# EAGLE board MicroMod-RP2040-ProcessorBoard-Panel (EAGLE 9.6.2), part 1 of 7
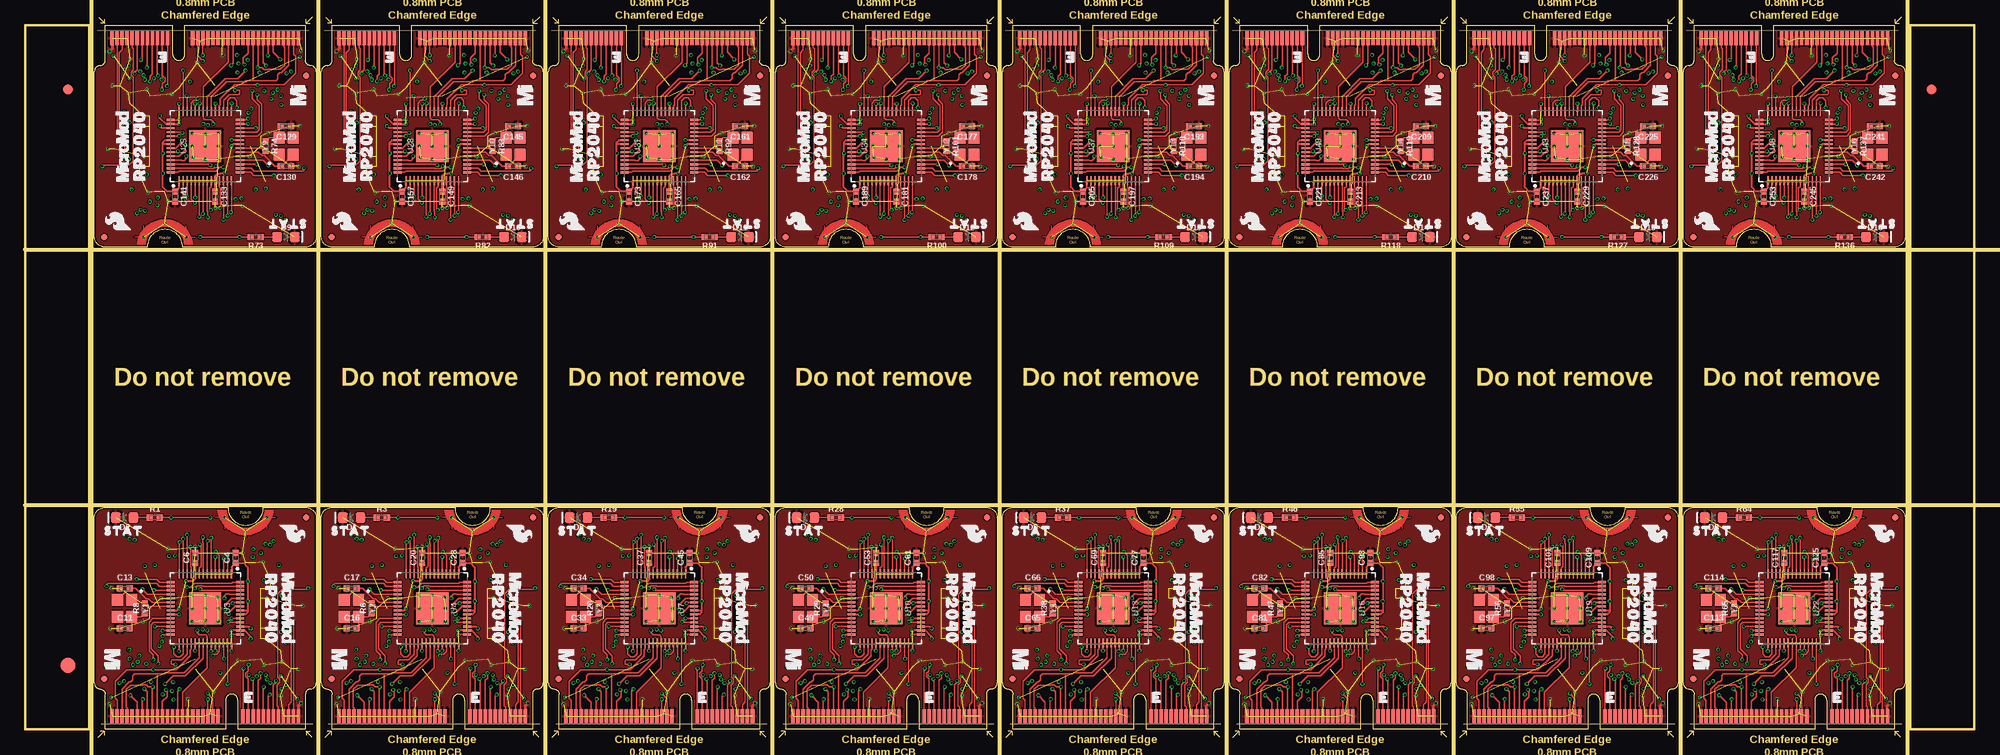
[diagram p0: board, top side]
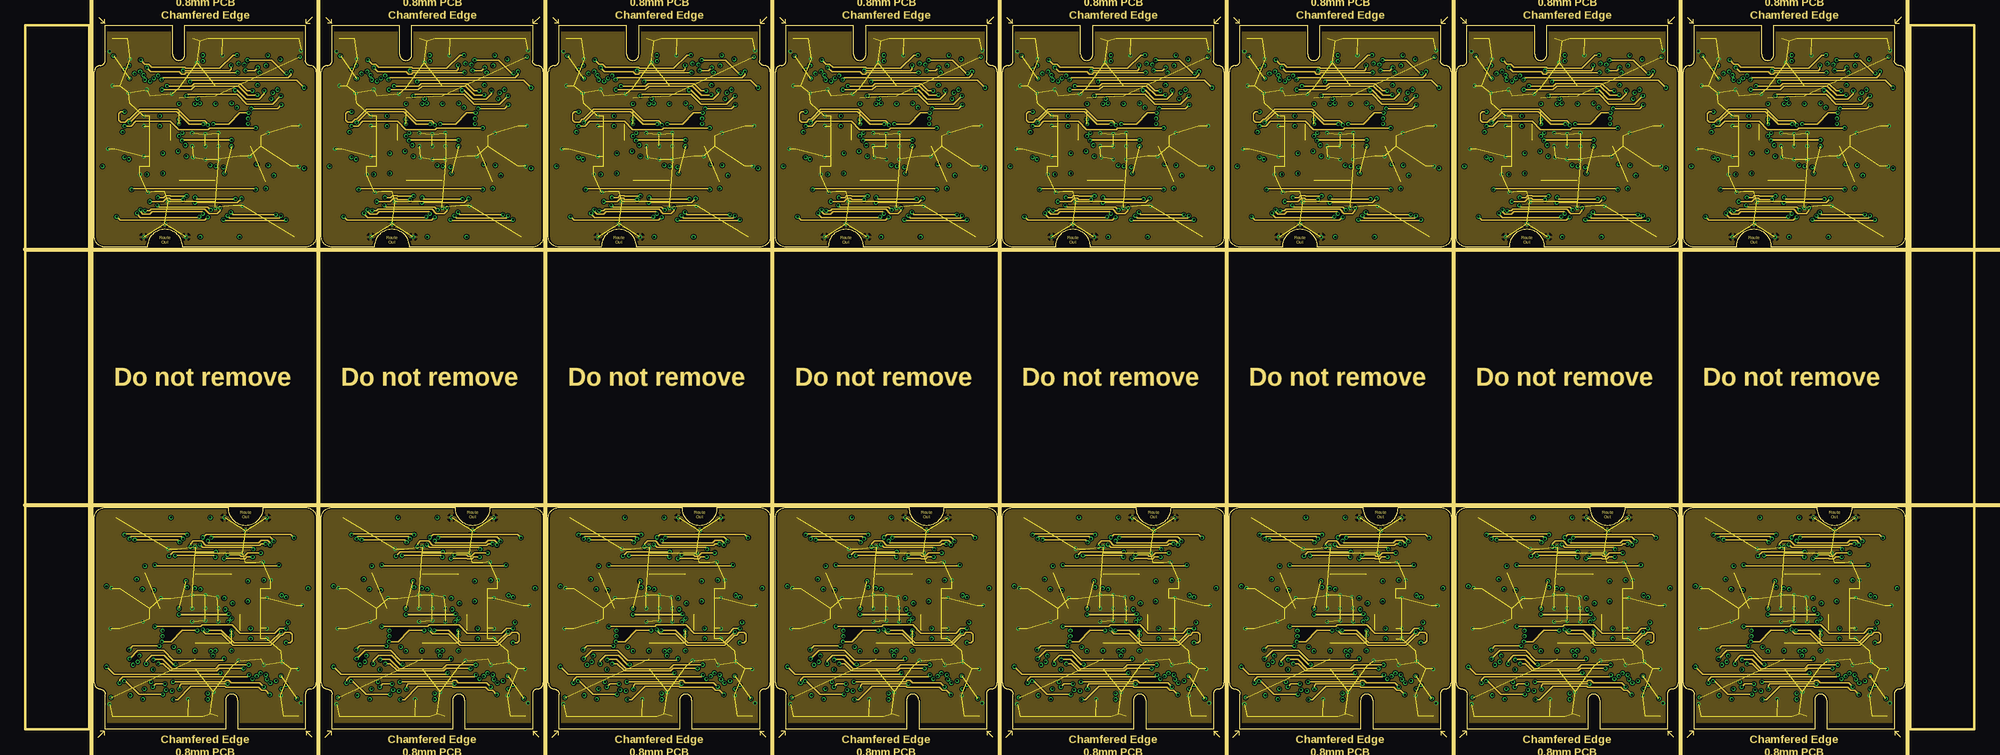
[diagram p1: board, inner layer Route2]
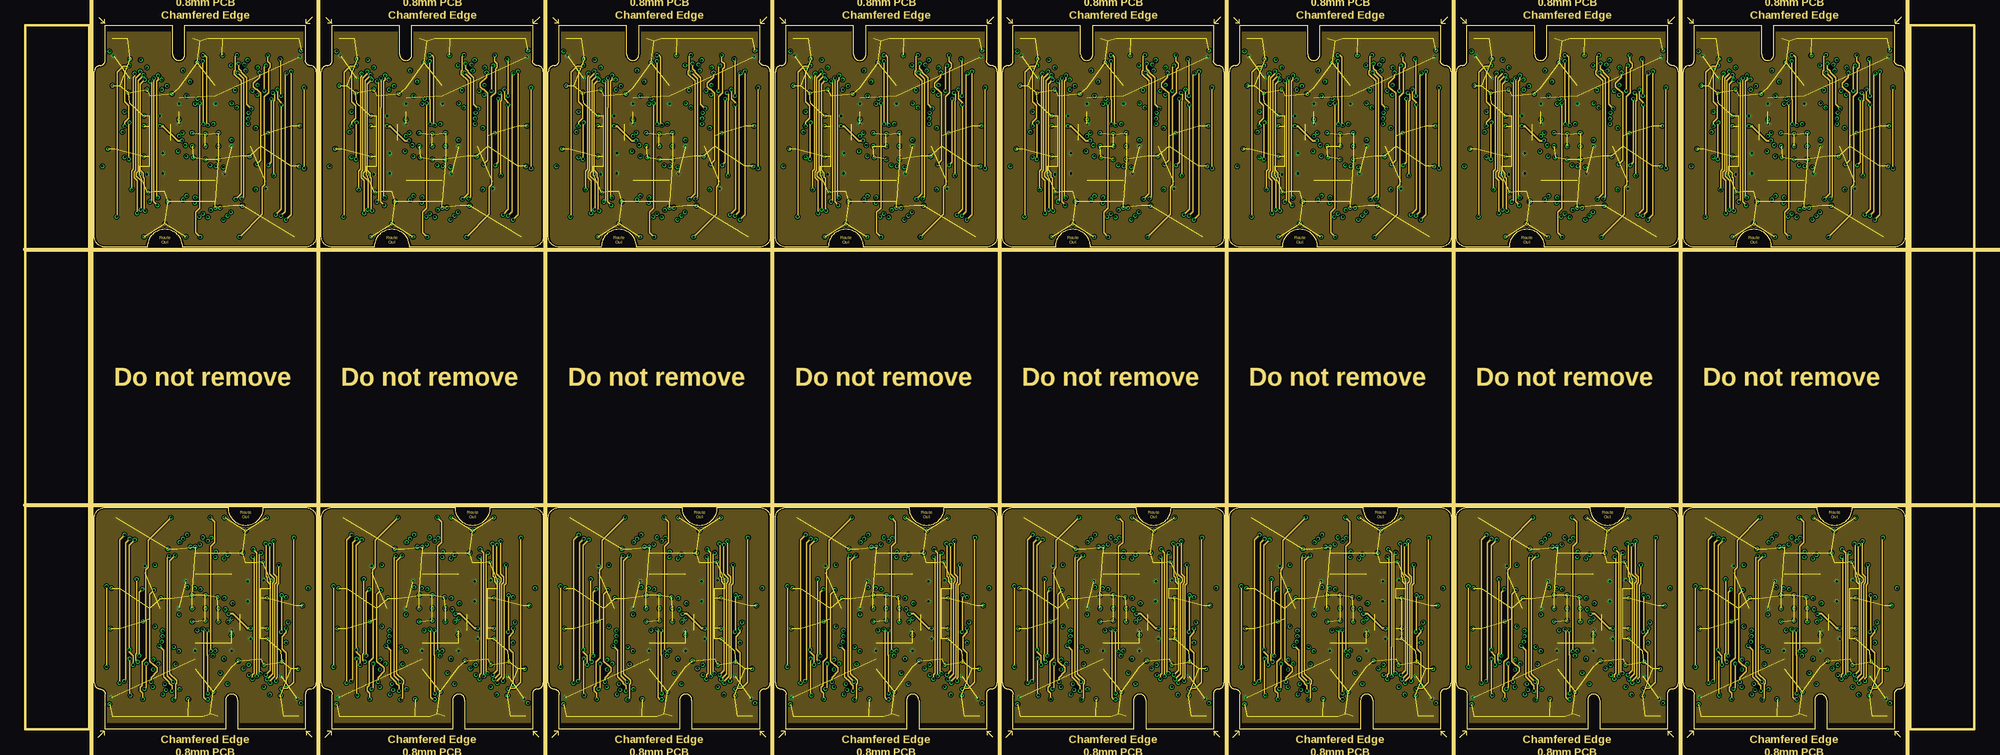
[diagram p2: board, inner layer Route15]
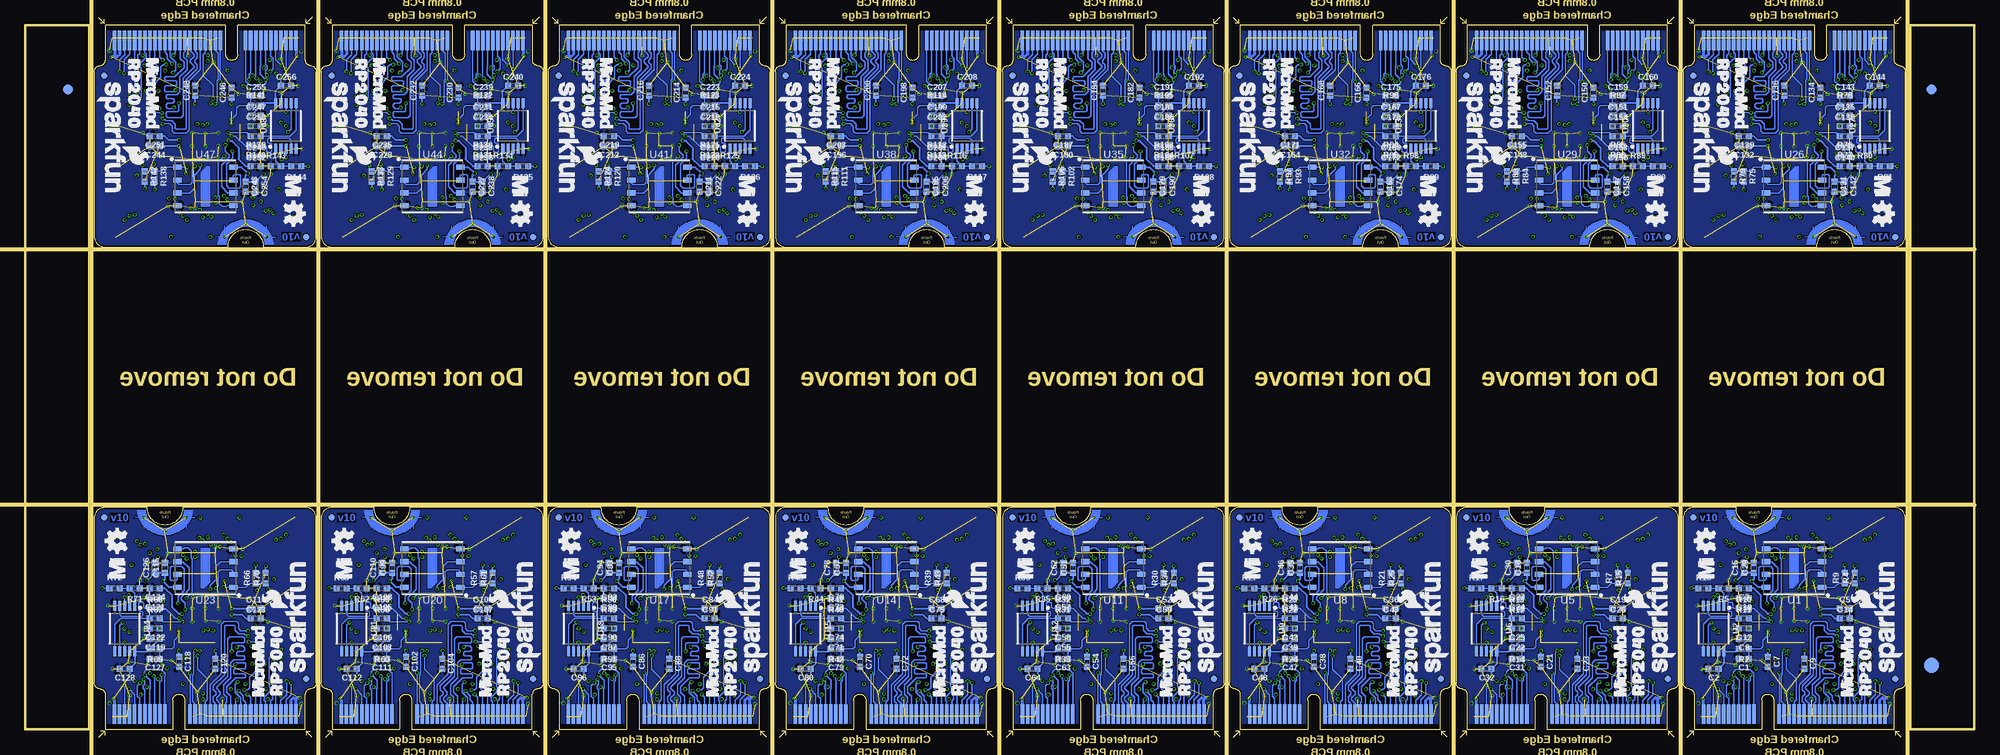
[diagram p3: board, bottom side, seen from below]

Size 193.27 x 69.85 mm. Coordinates in mm from the lower left corner, seen from the top.
Outline: 328 segments
Copper layers (1+2*15+16): Top 0.035mm / dielectric 1.5mm / Route2 0.035mm / dielectric 0.15mm / Route15 0.035mm / dielectric 0.2mm / Bottom 0.035mm
Design rules "MicroMod-RP2040-ProcessorBoard": minimum track width 4mil, minimum drill 0.2mm, track to track 4mil, track to pad 4mil, pad to pad 4mil, via to via 4mil, smd to smd 4mil, copper to edge 6mil, drill to drill 6mil, minimum pad ring 3mil, minimum via ring 3mil, stop-mask expansion 4mil, vias tented up to drill 25mil, thermal gap 10mil
Net classes: 1 DiffPair: width 0.127 mm, clearance 0.178 mm; 2 Clock: width 0.089 mm, clearance 0.178 mm
Milling: 11 lines

## Footprints (pad centres in the part's own frame; a part is rotated, then mirrored left to right if it is on the bottom)
0402-TIGHT = smd 0.6 x 0.6: 1 -0.5,0; 2 0.5,0
LED-0603 = smd 1 x 1: A -0.877,0; C 0.877,0
FIDUCIAL-1X2 = smd 1 x 1: 1 0,0
FIDUCIAL-1.5X3 = smd 1.5 x 1.5: 1 0,0
FIDUCIAL-MICRO = smd 0.635 x 0.635: 1 0,0
M.2-CARD-E-22 = smd 0.35 x 1.45: 1 9.25,1.275; 3 8.75,1.275; 5 8.25,1.275; 7 7.75,1.275; 9 7.25,1.275; 11 6.75,1.275; 13 6.25,1.275; 15 5.75,1.275; 17 5.25,1.275; 19 4.75,1.275; 21 4.25,1.275; 23 3.75,1.275; 33 1.25,1.275; 35 0.75,1.275; 37 0.25,1.275; 39 -0.25,1.275; 41 -0.75,1.275; 43 -1.25,1.275; 45 -1.75,1.275; 47 -2.25,1.275; 49 -2.75,1.275; 51 -3.25,1.275; 53 -3.75,1.275; 55 -4.25,1.275; 57 -4.75,1.275; 59 -5.25,1.275; 61 -5.75,1.275; 63 -6.25,1.275; 65 -6.75,1.275; 67 -7.25,1.275; 69 -7.75,1.275; 71 -8.25,1.275; 73 -8.75,1.275; 75 -9.25,1.275 | smd 0.35 x 1.95 bottom: 2 9,1.525; 4 8.5,1.525; 6 8,1.525; 8 7.5,1.525; 10 7,1.525; 12 6.5,1.525; 14 6,1.525; 16 5.5,1.525; 18 5,1.525; 20 4.5,1.525; 22 4,1.525; 32 1.5,1.525; 34 1,1.525; 36 0.5,1.525; 38 0,1.525; 40 -0.5,1.525; 42 -1,1.525; 44 -1.5,1.525; 46 -2,1.525; 48 -2.5,1.525; 50 -3,1.525; 52 -3.5,1.525; 54 -4,1.525; 56 -4.5,1.525; 58 -5,1.525; 60 -5.5,1.525; 62 -6,1.525; 64 -6.5,1.525; 66 -7,1.525; 68 -7.5,1.525; 70 -8,1.525; 72 -8.5,1.525; 74 -9,1.525 | drill 0.2: GND1 1.9,21; GND2 4,19.7; GND3 6.1,21
WSON-8-6X5-SKINNY_CENTERPAD = smd 0.85 x 0.5: 1 -2.775,1.905; 2 -2.775,0.635; 3 -2.775,-0.635; 4 -2.775,-1.905; 5 2.775,-1.905; 6 2.775,-0.635; 7 2.775,0.635; 8 2.775,1.905
MSOP10 = smd 1 x 0.3: 1 -2.25,1; 2 -2.25,0.5; 3 -2.25,0; 4 -2.25,-0.5; 5 -2.25,-1; 6 2.25,-1; 7 2.25,-0.5; 8 2.25,0; 9 2.25,0.5; 10 2.25,1
QFN-56 = smd 0.875 x 0.2: 1 -3.437,2.6; 2 -3.437,2.2; 3 -3.437,1.8; 4 -3.437,1.4; 5 -3.437,1; 6 -3.437,0.6; 7 -3.437,0.2; 8 -3.437,-0.2; 9 -3.437,-0.6; 10 -3.437,-1; 11 -3.437,-1.4; 12 -3.437,-1.8; 13 -3.437,-2.2; 14 -3.437,-2.6; 29 3.437,-2.6; 30 3.437,-2.2; 31 3.437,-1.8; 32 3.437,-1.4; 33 3.437,-1; 34 3.437,-0.6; 35 3.437,-0.2; 36 3.437,0.2; 37 3.437,0.6; 38 3.437,1; 39 3.437,1.4; 40 3.437,1.8; 41 3.437,2.2; 42 3.437,2.6 | smd 0.2 x 0.875: 15 -2.6,-3.437; 16 -2.2,-3.437; 17 -1.8,-3.437; 18 -1.4,-3.437; 19 -1,-3.437; 20 -0.6,-3.437; 21 -0.2,-3.437; 22 0.2,-3.437; 23 0.6,-3.437; 24 1,-3.437; 25 1.4,-3.437; 26 1.8,-3.437; 27 2.2,-3.437; 28 2.6,-3.437; 43 2.6,3.437; 44 2.2,3.437; 45 1.8,3.437; 46 1.4,3.437; 47 1,3.437; 48 0.6,3.437; 49 0.2,3.437; 50 -0.2,3.437; 51 -0.6,3.437; 52 -1,3.437; 53 -1.4,3.437; 54 -1.8,3.437; 55 -2.2,3.437; 56 -2.6,3.437 | smd 3.2 x 3.2: EPAD 0,0
CRYSTAL-SMD-2X2.5MM = smd 1.2 x 1.1: P1 0.846,0.69; P2 -0.854,0.69; P3 -0.854,-0.71; P4 0.846,-0.71

## Placement (x,y rotation side)
C1  2.2uF  [0402-TIGHT]  22.86,7 180 bottom
C2  0.1uF  [0402-TIGHT]  25.86,6 180 bottom
C3  2.2uF  [0402-TIGHT]  22.86,14 180 bottom
C4  2.2uF  [0402-TIGHT]  20.86,17 90 top
C5  0.1uF  [0402-TIGHT]  12.86,12 0 bottom
C6  0.1uF  [0402-TIGHT]  16.86,17 90 top
C7  0.1uF  [0402-TIGHT]  20.46,6.7 270 bottom
C8  0.1uF  [0402-TIGHT]  22.86,9 180 bottom
C9  0.1uF  [0402-TIGHT]  16.86,6.5 270 bottom
C10  0.1uF  [0402-TIGHT]  22.86,13 180 bottom
C11  15pF  [0402-TIGHT]  9.86,10 0 top
C12  0.1uF  [0402-TIGHT]  22.86,10 180 bottom
C13  15pF  [0402-TIGHT]  9.86,14 0 top
C14  0.1uF  [0402-TIGHT]  12.86,11 0 bottom
C15  2.2uF  [0402-TIGHT]  22.86,16 90 bottom
C16  15pF  [0402-TIGHT]  32.36,10 0 top
C17  15pF  [0402-TIGHT]  32.36,14 0 top
C18  0.1uF  [0402-TIGHT]  44.36,16 90 bottom
C19  0.1uF  [0402-TIGHT]  35.36,12 0 bottom
C20  0.1uF  [0402-TIGHT]  39.36,17 90 top
C21  0.1uF  [0402-TIGHT]  42.96,6.7 270 bottom
C22  0.1uF  [0402-TIGHT]  45.36,9 180 bottom
C23  0.1uF  [0402-TIGHT]  39.36,6.5 270 bottom
C24  0.1uF  [0402-TIGHT]  45.36,13 180 bottom
C25  0.1uF  [0402-TIGHT]  45.36,10 180 bottom
C26  0.1uF  [0402-TIGHT]  35.36,11 0 bottom
C27  2.2uF  [0402-TIGHT]  45.36,14 180 bottom
C28  2.2uF  [0402-TIGHT]  43.36,17 90 top
C29  0.1uF  [0402-TIGHT]  21.86,16 90 bottom
C30  2.2uF  [0402-TIGHT]  45.36,16 90 bottom
C31  2.2uF  [0402-TIGHT]  45.36,7 180 bottom
C32  0.1uF  [0402-TIGHT]  48.36,6 180 bottom
C33  15pF  [0402-TIGHT]  54.87,10 0 top
C34  15pF  [0402-TIGHT]  54.87,14 0 top
C35  0.1uF  [0402-TIGHT]  66.87,16 90 bottom
C36  0.1uF  [0402-TIGHT]  57.87,12 0 bottom
C37  0.1uF  [0402-TIGHT]  61.87,17 90 top
C38  0.1uF  [0402-TIGHT]  65.47,6.7 270 bottom
C39  0.1uF  [0402-TIGHT]  67.87,9 180 bottom
C40  0.1uF  [0402-TIGHT]  61.87,6.5 270 bottom
C41  0.1uF  [0402-TIGHT]  67.87,13 180 bottom
C42  0.1uF  [0402-TIGHT]  67.87,10 180 bottom
C43  0.1uF  [0402-TIGHT]  57.87,11 0 bottom
C44  2.2uF  [0402-TIGHT]  67.87,14 180 bottom
C45  2.2uF  [0402-TIGHT]  65.87,17 90 top
C46  2.2uF  [0402-TIGHT]  67.87,16 90 bottom
C47  2.2uF  [0402-TIGHT]  67.87,7 180 bottom
C48  0.1uF  [0402-TIGHT]  70.87,6 180 bottom
C49  15pF  [0402-TIGHT]  77.38,10 0 top
C50  15pF  [0402-TIGHT]  77.38,14 0 top
C51  0.1uF  [0402-TIGHT]  89.38,16 90 bottom
C52  0.1uF  [0402-TIGHT]  80.38,12 0 bottom
C53  0.1uF  [0402-TIGHT]  84.38,17 90 top
C54  0.1uF  [0402-TIGHT]  87.98,6.7 270 bottom
C55  0.1uF  [0402-TIGHT]  90.38,9 180 bottom
C56  0.1uF  [0402-TIGHT]  84.38,6.5 270 bottom
C57  0.1uF  [0402-TIGHT]  90.38,13 180 bottom
C58  0.1uF  [0402-TIGHT]  90.38,10 180 bottom
C59  0.1uF  [0402-TIGHT]  80.38,11 0 bottom
C60  2.2uF  [0402-TIGHT]  90.38,14 180 bottom
C61  2.2uF  [0402-TIGHT]  88.38,17 90 top
C62  2.2uF  [0402-TIGHT]  90.38,16 90 bottom
C63  2.2uF  [0402-TIGHT]  90.38,7 180 bottom
C64  0.1uF  [0402-TIGHT]  93.38,6 180 bottom
C65  15pF  [0402-TIGHT]  99.89,10 0 top
C66  15pF  [0402-TIGHT]  99.89,14 0 top
C67  0.1uF  [0402-TIGHT]  111.89,16 90 bottom
C68  0.1uF  [0402-TIGHT]  102.89,12 0 bottom
C69  0.1uF  [0402-TIGHT]  106.89,17 90 top
C70  0.1uF  [0402-TIGHT]  110.49,6.7 270 bottom
C71  0.1uF  [0402-TIGHT]  112.89,9 180 bottom
C72  0.1uF  [0402-TIGHT]  106.89,6.5 270 bottom
C73  0.1uF  [0402-TIGHT]  112.89,13 180 bottom
C74  0.1uF  [0402-TIGHT]  112.89,10 180 bottom
C75  0.1uF  [0402-TIGHT]  102.89,11 0 bottom
C76  2.2uF  [0402-TIGHT]  112.89,14 180 bottom
C77  2.2uF  [0402-TIGHT]  110.89,17 90 top
C78  2.2uF  [0402-TIGHT]  112.89,16 90 bottom
C79  2.2uF  [0402-TIGHT]  112.89,7 180 bottom
C80  0.1uF  [0402-TIGHT]  115.89,6 180 bottom
C81  15pF  [0402-TIGHT]  122.4,10 0 top
C82  15pF  [0402-TIGHT]  122.4,14 0 top
C83  0.1uF  [0402-TIGHT]  134.4,16 90 bottom
C84  0.1uF  [0402-TIGHT]  125.4,12 0 bottom
C85  0.1uF  [0402-TIGHT]  129.4,17 90 top
C86  0.1uF  [0402-TIGHT]  133,6.7 270 bottom
C87  0.1uF  [0402-TIGHT]  135.4,9 180 bottom
C88  0.1uF  [0402-TIGHT]  129.4,6.5 270 bottom
C89  0.1uF  [0402-TIGHT]  135.4,13 180 bottom
C90  0.1uF  [0402-TIGHT]  135.4,10 180 bottom
C91  0.1uF  [0402-TIGHT]  125.4,11 0 bottom
C92  2.2uF  [0402-TIGHT]  135.4,14 180 bottom
C93  2.2uF  [0402-TIGHT]  133.4,17 90 top
C94  2.2uF  [0402-TIGHT]  135.4,16 90 bottom
C95  2.2uF  [0402-TIGHT]  135.4,7 180 bottom
C96  0.1uF  [0402-TIGHT]  138.4,6 180 bottom
C97  15pF  [0402-TIGHT]  144.91,10 0 top
C98  15pF  [0402-TIGHT]  144.91,14 0 top
C99  0.1uF  [0402-TIGHT]  156.91,16 90 bottom
C100  0.1uF  [0402-TIGHT]  147.91,12 0 bottom
C101  0.1uF  [0402-TIGHT]  151.91,17 90 top
C102  0.1uF  [0402-TIGHT]  155.51,6.7 270 bottom
C103  0.1uF  [0402-TIGHT]  157.91,9 180 bottom
C104  0.1uF  [0402-TIGHT]  151.91,6.5 270 bottom
C105  0.1uF  [0402-TIGHT]  157.91,13 180 bottom
C106  0.1uF  [0402-TIGHT]  157.91,10 180 bottom
C107  0.1uF  [0402-TIGHT]  147.91,11 0 bottom
C108  2.2uF  [0402-TIGHT]  157.91,14 180 bottom
C109  2.2uF  [0402-TIGHT]  155.91,17 90 top
C110  2.2uF  [0402-TIGHT]  157.91,16 90 bottom
C111  2.2uF  [0402-TIGHT]  157.91,7 180 bottom
C112  0.1uF  [0402-TIGHT]  160.91,6 180 bottom
C113  15pF  [0402-TIGHT]  167.41,10 0 top
C114  15pF  [0402-TIGHT]  167.41,14 0 top
C115  0.1uF  [0402-TIGHT]  179.41,16 90 bottom
C116  0.1uF  [0402-TIGHT]  170.41,12 0 bottom
C117  0.1uF  [0402-TIGHT]  174.41,17 90 top
C118  0.1uF  [0402-TIGHT]  178.01,6.7 270 bottom
C119  0.1uF  [0402-TIGHT]  180.41,9 180 bottom
C120  0.1uF  [0402-TIGHT]  174.41,6.5 270 bottom
C121  0.1uF  [0402-TIGHT]  180.41,13 180 bottom
C122  0.1uF  [0402-TIGHT]  180.41,10 180 bottom
C123  0.1uF  [0402-TIGHT]  170.41,11 0 bottom
C124  2.2uF  [0402-TIGHT]  180.41,14 180 bottom
C125  2.2uF  [0402-TIGHT]  178.41,17 90 top
C126  2.2uF  [0402-TIGHT]  180.41,16 90 bottom
C127  2.2uF  [0402-TIGHT]  180.41,7 180 bottom
C128  0.1uF  [0402-TIGHT]  183.41,6 180 bottom
C129  15pF  [0402-TIGHT]  25.86,59.85 180 top
C130  15pF  [0402-TIGHT]  25.86,55.85 180 top
C131  0.1uF  [0402-TIGHT]  13.86,53.85 270 bottom
C132  0.1uF  [0402-TIGHT]  22.86,57.85 180 bottom
C133  0.1uF  [0402-TIGHT]  18.86,52.85 270 top
C134  0.1uF  [0402-TIGHT]  15.26,63.15 90 bottom
C135  0.1uF  [0402-TIGHT]  12.86,60.85 0 bottom
C136  0.1uF  [0402-TIGHT]  18.86,63.35 90 bottom
C137  0.1uF  [0402-TIGHT]  12.86,56.85 0 bottom
C138  0.1uF  [0402-TIGHT]  12.86,59.85 0 bottom
C139  0.1uF  [0402-TIGHT]  22.86,58.85 180 bottom
C140  2.2uF  [0402-TIGHT]  12.86,55.85 0 bottom
C141  2.2uF  [0402-TIGHT]  14.86,52.85 270 top
C142  2.2uF  [0402-TIGHT]  12.86,53.85 270 bottom
C143  2.2uF  [0402-TIGHT]  12.86,62.85 0 bottom
C144  0.1uF  [0402-TIGHT]  9.86,63.85 0 bottom
C145  15pF  [0402-TIGHT]  48.37,59.85 180 top
C146  15pF  [0402-TIGHT]  48.37,55.85 180 top
C147  0.1uF  [0402-TIGHT]  36.37,53.85 270 bottom
C148  0.1uF  [0402-TIGHT]  45.37,57.85 180 bottom
C149  0.1uF  [0402-TIGHT]  41.37,52.85 270 top
C150  0.1uF  [0402-TIGHT]  37.77,63.15 90 bottom
C151  0.1uF  [0402-TIGHT]  35.37,60.85 0 bottom
C152  0.1uF  [0402-TIGHT]  41.37,63.35 90 bottom
C153  0.1uF  [0402-TIGHT]  35.37,56.85 0 bottom
C154  0.1uF  [0402-TIGHT]  35.37,59.85 0 bottom
C155  0.1uF  [0402-TIGHT]  45.37,58.85 180 bottom
C156  2.2uF  [0402-TIGHT]  35.37,55.85 0 bottom
C157  2.2uF  [0402-TIGHT]  37.37,52.85 270 top
C158  2.2uF  [0402-TIGHT]  35.37,53.85 270 bottom
C159  2.2uF  [0402-TIGHT]  35.37,62.85 0 bottom
C160  0.1uF  [0402-TIGHT]  32.37,63.85 0 bottom
C161  15pF  [0402-TIGHT]  70.87,59.85 180 top
C162  15pF  [0402-TIGHT]  70.87,55.85 180 top
C163  0.1uF  [0402-TIGHT]  58.87,53.85 270 bottom
C164  0.1uF  [0402-TIGHT]  67.87,57.85 180 bottom
C165  0.1uF  [0402-TIGHT]  63.87,52.85 270 top
C166  0.1uF  [0402-TIGHT]  60.27,63.15 90 bottom
C167  0.1uF  [0402-TIGHT]  57.87,60.85 0 bottom
C168  0.1uF  [0402-TIGHT]  63.87,63.35 90 bottom
C169  0.1uF  [0402-TIGHT]  57.87,56.85 0 bottom
C170  0.1uF  [0402-TIGHT]  57.87,59.85 0 bottom
C171  0.1uF  [0402-TIGHT]  67.87,58.85 180 bottom
C172  2.2uF  [0402-TIGHT]  57.87,55.85 0 bottom
C173  2.2uF  [0402-TIGHT]  59.87,52.85 270 top
C174  2.2uF  [0402-TIGHT]  57.87,53.85 270 bottom
C175  2.2uF  [0402-TIGHT]  57.87,62.85 0 bottom
C176  0.1uF  [0402-TIGHT]  54.87,63.85 0 bottom
C177  15pF  [0402-TIGHT]  93.38,59.85 180 top
C178  15pF  [0402-TIGHT]  93.38,55.85 180 top
C179  0.1uF  [0402-TIGHT]  81.38,53.85 270 bottom
C180  0.1uF  [0402-TIGHT]  90.38,57.85 180 bottom
C181  0.1uF  [0402-TIGHT]  86.38,52.85 270 top
C182  0.1uF  [0402-TIGHT]  82.78,63.15 90 bottom
C183  0.1uF  [0402-TIGHT]  80.38,60.85 0 bottom
C184  0.1uF  [0402-TIGHT]  86.38,63.35 90 bottom
C185  0.1uF  [0402-TIGHT]  80.38,56.85 0 bottom
C186  0.1uF  [0402-TIGHT]  80.38,59.85 0 bottom
C187  0.1uF  [0402-TIGHT]  90.38,58.85 180 bottom
C188  2.2uF  [0402-TIGHT]  80.38,55.85 0 bottom
C189  2.2uF  [0402-TIGHT]  82.38,52.85 270 top
C190  2.2uF  [0402-TIGHT]  80.38,53.85 270 bottom
C191  2.2uF  [0402-TIGHT]  80.38,62.85 0 bottom
C192  0.1uF  [0402-TIGHT]  77.38,63.85 0 bottom
C193  15pF  [0402-TIGHT]  115.89,59.85 180 top
C194  15pF  [0402-TIGHT]  115.89,55.85 180 top
C195  0.1uF  [0402-TIGHT]  103.89,53.85 270 bottom
C196  0.1uF  [0402-TIGHT]  112.89,57.85 180 bottom
C197  0.1uF  [0402-TIGHT]  108.89,52.85 270 top
C198  0.1uF  [0402-TIGHT]  105.29,63.15 90 bottom
C199  0.1uF  [0402-TIGHT]  102.89,60.85 0 bottom
C200  0.1uF  [0402-TIGHT]  108.89,63.35 90 bottom
C201  0.1uF  [0402-TIGHT]  102.89,56.85 0 bottom
C202  0.1uF  [0402-TIGHT]  102.89,59.85 0 bottom
C203  0.1uF  [0402-TIGHT]  112.89,58.85 180 bottom
C204  2.2uF  [0402-TIGHT]  102.89,55.85 0 bottom
C205  2.2uF  [0402-TIGHT]  104.89,52.85 270 top
C206  2.2uF  [0402-TIGHT]  102.89,53.85 270 bottom
C207  2.2uF  [0402-TIGHT]  102.89,62.85 0 bottom
C208  0.1uF  [0402-TIGHT]  99.89,63.85 0 bottom
C209  15pF  [0402-TIGHT]  138.4,59.85 180 top
C210  15pF  [0402-TIGHT]  138.4,55.85 180 top
C211  0.1uF  [0402-TIGHT]  126.4,53.85 270 bottom
C212  0.1uF  [0402-TIGHT]  135.4,57.85 180 bottom
C213  0.1uF  [0402-TIGHT]  131.4,52.85 270 top
C214  0.1uF  [0402-TIGHT]  127.8,63.15 90 bottom
C215  0.1uF  [0402-TIGHT]  125.4,60.85 0 bottom
C216  0.1uF  [0402-TIGHT]  131.4,63.35 90 bottom
C217  0.1uF  [0402-TIGHT]  125.4,56.85 0 bottom
C218  0.1uF  [0402-TIGHT]  125.4,59.85 0 bottom
C219  0.1uF  [0402-TIGHT]  135.4,58.85 180 bottom
C220  2.2uF  [0402-TIGHT]  125.4,55.85 0 bottom
C221  2.2uF  [0402-TIGHT]  127.4,52.85 270 top
C222  2.2uF  [0402-TIGHT]  125.4,53.85 270 bottom
C223  2.2uF  [0402-TIGHT]  125.4,62.85 0 bottom
C224  0.1uF  [0402-TIGHT]  122.4,63.85 0 bottom
C225  15pF  [0402-TIGHT]  160.91,59.85 180 top
C226  15pF  [0402-TIGHT]  160.91,55.85 180 top
C227  0.1uF  [0402-TIGHT]  148.91,53.85 270 bottom
C228  0.1uF  [0402-TIGHT]  157.91,57.85 180 bottom
C229  0.1uF  [0402-TIGHT]  153.91,52.85 270 top
C230  0.1uF  [0402-TIGHT]  150.31,63.15 90 bottom
C231  0.1uF  [0402-TIGHT]  147.91,60.85 0 bottom
C232  0.1uF  [0402-TIGHT]  153.91,63.35 90 bottom
C233  0.1uF  [0402-TIGHT]  147.91,56.85 0 bottom
C234  0.1uF  [0402-TIGHT]  147.91,59.85 0 bottom
C235  0.1uF  [0402-TIGHT]  157.91,58.85 180 bottom
C236  2.2uF  [0402-TIGHT]  147.91,55.85 0 bottom
C237  2.2uF  [0402-TIGHT]  149.91,52.85 270 top
C238  2.2uF  [0402-TIGHT]  147.91,53.85 270 bottom
C239  2.2uF  [0402-TIGHT]  147.91,62.85 0 bottom
C240  0.1uF  [0402-TIGHT]  144.91,63.85 0 bottom
C241  15pF  [0402-TIGHT]  183.41,59.85 180 top
C242  15pF  [0402-TIGHT]  183.41,55.85 180 top
C243  0.1uF  [0402-TIGHT]  171.41,53.85 270 bottom
C244  0.1uF  [0402-TIGHT]  180.41,57.85 180 bottom
C245  0.1uF  [0402-TIGHT]  176.41,52.85 270 top
C246  0.1uF  [0402-TIGHT]  172.81,63.15 90 bottom
C247  0.1uF  [0402-TIGHT]  170.41,60.85 0 bottom
C248  0.1uF  [0402-TIGHT]  176.41,63.35 90 bottom
C249  0.1uF  [0402-TIGHT]  170.41,56.85 0 bottom
C250  0.1uF  [0402-TIGHT]  170.41,59.85 0 bottom
C251  0.1uF  [0402-TIGHT]  180.41,58.85 180 bottom
C252  2.2uF  [0402-TIGHT]  170.41,55.85 0 bottom
C253  2.2uF  [0402-TIGHT]  172.41,52.85 270 top
C254  2.2uF  [0402-TIGHT]  170.41,53.85 270 bottom
C255  2.2uF  [0402-TIGHT]  170.41,62.85 0 bottom
C256  0.1uF  [0402-TIGHT]  167.41,63.85 0 bottom
D1  BLUE  [LED-0603]  32.36,21 180 top
D2  BLUE  [LED-0603]  9.86,21 180 top
D3  BLUE  [LED-0603]  54.87,21 180 top
D4  BLUE  [LED-0603]  77.38,21 180 top
D5  BLUE  [LED-0603]  99.89,21 180 top
D6  BLUE  [LED-0603]  122.4,21 180 top
D7  BLUE  [LED-0603]  144.91,21 180 top
D8  BLUE  [LED-0603]  167.41,21 180 top
D9  BLUE  [LED-0603]  25.86,48.85 0 top
D10  BLUE  [LED-0603]  48.37,48.85 0 top
D11  BLUE  [LED-0603]  70.87,48.85 0 top
D12  BLUE  [LED-0603]  93.38,48.85 0 top
D13  BLUE  [LED-0603]  115.89,48.85 0 top
D14  BLUE  [LED-0603]  138.4,48.85 0 top
D15  BLUE  [LED-0603]  160.91,48.85 0 top
D16  BLUE  [LED-0603]  183.41,48.85 0 top
E$1  [FIDUCIAL-1X2]  4.23,63.5 0 top
E$2  [FIDUCIAL-1X2]  4.23,63.5 0 bottom
E$3  [FIDUCIAL-1X2]  189.04,63.5 0 top
E$4  [FIDUCIAL-1X2]  189.04,63.5 0 bottom
E$5  [FIDUCIAL-1.5X3]  4.23,6.35 0 top
E$6  [FIDUCIAL-1.5X3]  4.23,6.35 0 bottom
FD1  FIDUCIALUFIDUCIAL  [FIDUCIAL-MICRO]  7.86,5 0 top
FD2  FIDUCIALUFIDUCIAL  [FIDUCIAL-MICRO]  27.86,21 0 top
FD3  FIDUCIALUFIDUCIAL  [FIDUCIAL-MICRO]  27.86,21 0 bottom
FD4  FIDUCIALUFIDUCIAL  [FIDUCIAL-MICRO]  7.86,5 0 bottom
FD5  FIDUCIALUFIDUCIAL  [FIDUCIAL-MICRO]  30.36,5 0 top
FD6  FIDUCIALUFIDUCIAL  [FIDUCIAL-MICRO]  50.36,21 0 top
FD7  FIDUCIALUFIDUCIAL  [FIDUCIAL-MICRO]  50.36,21 0 bottom
FD8  FIDUCIALUFIDUCIAL  [FIDUCIAL-MICRO]  30.36,5 0 bottom
FD9  FIDUCIALUFIDUCIAL  [FIDUCIAL-MICRO]  52.87,5 0 top
FD10  FIDUCIALUFIDUCIAL  [FIDUCIAL-MICRO]  72.87,21 0 top
FD11  FIDUCIALUFIDUCIAL  [FIDUCIAL-MICRO]  72.87,21 0 bottom
FD12  FIDUCIALUFIDUCIAL  [FIDUCIAL-MICRO]  52.87,5 0 bottom
FD13  FIDUCIALUFIDUCIAL  [FIDUCIAL-MICRO]  75.38,5 0 top
FD14  FIDUCIALUFIDUCIAL  [FIDUCIAL-MICRO]  95.38,21 0 top
FD15  FIDUCIALUFIDUCIAL  [FIDUCIAL-MICRO]  95.38,21 0 bottom
FD16  FIDUCIALUFIDUCIAL  [FIDUCIAL-MICRO]  75.38,5 0 bottom
FD17  FIDUCIALUFIDUCIAL  [FIDUCIAL-MICRO]  97.89,5 0 top
FD18  FIDUCIALUFIDUCIAL  [FIDUCIAL-MICRO]  117.89,21 0 top
FD19  FIDUCIALUFIDUCIAL  [FIDUCIAL-MICRO]  117.89,21 0 bottom
FD20  FIDUCIALUFIDUCIAL  [FIDUCIAL-MICRO]  97.89,5 0 bottom
FD21  FIDUCIALUFIDUCIAL  [FIDUCIAL-MICRO]  120.4,5 0 top
FD22  FIDUCIALUFIDUCIAL  [FIDUCIAL-MICRO]  140.4,21 0 top
FD23  FIDUCIALUFIDUCIAL  [FIDUCIAL-MICRO]  140.4,21 0 bottom
FD24  FIDUCIALUFIDUCIAL  [FIDUCIAL-MICRO]  120.4,5 0 bottom
FD25  FIDUCIALUFIDUCIAL  [FIDUCIAL-MICRO]  142.91,5 0 top
FD26  FIDUCIALUFIDUCIAL  [FIDUCIAL-MICRO]  162.91,21 0 top
FD27  FIDUCIALUFIDUCIAL  [FIDUCIAL-MICRO]  162.91,21 0 bottom
FD28  FIDUCIALUFIDUCIAL  [FIDUCIAL-MICRO]  142.91,5 0 bottom
FD29  FIDUCIALUFIDUCIAL  [FIDUCIAL-MICRO]  165.41,5 0 top
FD30  FIDUCIALUFIDUCIAL  [FIDUCIAL-MICRO]  185.41,21 0 top
FD31  FIDUCIALUFIDUCIAL  [FIDUCIAL-MICRO]  185.41,21 0 bottom
FD32  FIDUCIALUFIDUCIAL  [FIDUCIAL-MICRO]  165.41,5 0 bottom
FD33  FIDUCIALUFIDUCIAL  [FIDUCIAL-MICRO]  27.86,64.85 180 top
FD34  FIDUCIALUFIDUCIAL  [FIDUCIAL-MICRO]  7.86,48.85 180 top
FD35  FIDUCIALUFIDUCIAL  [FIDUCIAL-MICRO]  7.86,48.85 180 bottom
FD36  FIDUCIALUFIDUCIAL  [FIDUCIAL-MICRO]  27.86,64.85 180 bottom
FD37  FIDUCIALUFIDUCIAL  [FIDUCIAL-MICRO]  50.37,64.85 180 top
FD38  FIDUCIALUFIDUCIAL  [FIDUCIAL-MICRO]  30.37,48.85 180 top
FD39  FIDUCIALUFIDUCIAL  [FIDUCIAL-MICRO]  30.37,48.85 180 bottom
FD40  FIDUCIALUFIDUCIAL  [FIDUCIAL-MICRO]  50.37,64.85 180 bottom
FD41  FIDUCIALUFIDUCIAL  [FIDUCIAL-MICRO]  72.87,64.85 180 top
FD42  FIDUCIALUFIDUCIAL  [FIDUCIAL-MICRO]  52.87,48.85 180 top
FD43  FIDUCIALUFIDUCIAL  [FIDUCIAL-MICRO]  52.87,48.85 180 bottom
FD44  FIDUCIALUFIDUCIAL  [FIDUCIAL-MICRO]  72.87,64.85 180 bottom
FD45  FIDUCIALUFIDUCIAL  [FIDUCIAL-MICRO]  95.38,64.85 180 top
FD46  FIDUCIALUFIDUCIAL  [FIDUCIAL-MICRO]  75.38,48.85 180 top
FD47  FIDUCIALUFIDUCIAL  [FIDUCIAL-MICRO]  75.38,48.85 180 bottom
FD48  FIDUCIALUFIDUCIAL  [FIDUCIAL-MICRO]  95.38,64.85 180 bottom
FD49  FIDUCIALUFIDUCIAL  [FIDUCIAL-MICRO]  117.89,64.85 180 top
FD50  FIDUCIALUFIDUCIAL  [FIDUCIAL-MICRO]  97.89,48.85 180 top
FD51  FIDUCIALUFIDUCIAL  [FIDUCIAL-MICRO]  97.89,48.85 180 bottom
FD52  FIDUCIALUFIDUCIAL  [FIDUCIAL-MICRO]  117.89,64.85 180 bottom
FD53  FIDUCIALUFIDUCIAL  [FIDUCIAL-MICRO]  140.4,64.85 180 top
FD54  FIDUCIALUFIDUCIAL  [FIDUCIAL-MICRO]  120.4,48.85 180 top
FD55  FIDUCIALUFIDUCIAL  [FIDUCIAL-MICRO]  120.4,48.85 180 bottom
FD56  FIDUCIALUFIDUCIAL  [FIDUCIAL-MICRO]  140.4,64.85 180 bottom
FD57  FIDUCIALUFIDUCIAL  [FIDUCIAL-MICRO]  162.91,64.85 180 top
FD58  FIDUCIALUFIDUCIAL  [FIDUCIAL-MICRO]  142.91,48.85 180 top
FD59  FIDUCIALUFIDUCIAL  [FIDUCIAL-MICRO]  142.91,48.85 180 bottom
FD60  FIDUCIALUFIDUCIAL  [FIDUCIAL-MICRO]  162.91,64.85 180 bottom
FD61  FIDUCIALUFIDUCIAL  [FIDUCIAL-MICRO]  185.41,64.85 180 top
FD62  FIDUCIALUFIDUCIAL  [FIDUCIAL-MICRO]  165.41,48.85 180 top
FD63  FIDUCIALUFIDUCIAL  [FIDUCIAL-MICRO]  165.41,48.85 180 bottom
FD64  FIDUCIALUFIDUCIAL  [FIDUCIAL-MICRO]  185.41,64.85 180 bottom
J1  MICROMOD-2222  [M.2-CARD-E-22]  17.86,0 0 top
J2  MICROMOD-2222  [M.2-CARD-E-22]  40.36,0 0 top
J3  MICROMOD-2222  [M.2-CARD-E-22]  62.87,0 0 top
J4  MICROMOD-2222  [M.2-CARD-E-22]  85.38,0 0 top
J5  MICROMOD-2222  [M.2-CARD-E-22]  107.89,0 0 top
J6  MICROMOD-2222  [M.2-CARD-E-22]  130.4,0 0 top
J7  MICROMOD-2222  [M.2-CARD-E-22]  152.91,0 0 top
J8  MICROMOD-2222  [M.2-CARD-E-22]  175.41,0 0 top
J9  MICROMOD-2222  [M.2-CARD-E-22]  17.86,69.85 180 top
J10  MICROMOD-2222  [M.2-CARD-E-22]  40.37,69.85 180 top
J11  MICROMOD-2222  [M.2-CARD-E-22]  62.87,69.85 180 top
J12  MICROMOD-2222  [M.2-CARD-E-22]  85.38,69.85 180 top
J13  MICROMOD-2222  [M.2-CARD-E-22]  107.89,69.85 180 top
J14  MICROMOD-2222  [M.2-CARD-E-22]  130.4,69.85 180 top
J15  MICROMOD-2222  [M.2-CARD-E-22]  152.91,69.85 180 top
J16  MICROMOD-2222  [M.2-CARD-E-22]  175.41,69.85 180 top
LOGO1  SFE_LOGO_NAME_FLAME.1_INCH  [SFE_LOGO_NAME_FLAME_.1]  8.56,11.2 90 bottom
LOGO2  SFE_LOGO_FLAME.1_INCH  [SFE_LOGO_FLAME_.1]  26.54,19.43 270 top
LOGO3  OSHW-LOGOMINI  [OSHW-LOGO-MINI]  26.6,18.7 90 bottom
LOGO4  OSHW-LOGOMINI  [OSHW-LOGO-MINI]  49.11,18.7 90 bottom
LOGO5  SFE_LOGO_NAME_FLAME.1_INCH  [SFE_LOGO_NAME_FLAME_.1]  31.06,11.2 90 bottom
LOGO6  SFE_LOGO_FLAME.1_INCH  [SFE_LOGO_FLAME_.1]  49.05,19.43 270 top
LOGO7  OSHW-LOGOMINI  [OSHW-LOGO-MINI]  71.62,18.7 90 bottom
LOGO8  SFE_LOGO_NAME_FLAME.1_INCH  [SFE_LOGO_NAME_FLAME_.1]  53.57,11.2 90 bottom
LOGO9  SFE_LOGO_FLAME.1_INCH  [SFE_LOGO_FLAME_.1]  71.56,19.43 270 top
LOGO10  OSHW-LOGOMINI  [OSHW-LOGO-MINI]  94.13,18.7 90 bottom
LOGO11  SFE_LOGO_NAME_FLAME.1_INCH  [SFE_LOGO_NAME_FLAME_.1]  76.08,11.2 90 bottom
LOGO12  SFE_LOGO_FLAME.1_INCH  [SFE_LOGO_FLAME_.1]  94.07,19.43 270 top
LOGO13  OSHW-LOGOMINI  [OSHW-LOGO-MINI]  116.64,18.7 90 bottom
LOGO14  SFE_LOGO_NAME_FLAME.1_INCH  [SFE_LOGO_NAME_FLAME_.1]  98.59,11.2 90 bottom
LOGO15  SFE_LOGO_FLAME.1_INCH  [SFE_LOGO_FLAME_.1]  116.58,19.43 270 top
LOGO16  OSHW-LOGOMINI  [OSHW-LOGO-MINI]  139.14,18.7 90 bottom
LOGO17  SFE_LOGO_NAME_FLAME.1_INCH  [SFE_LOGO_NAME_FLAME_.1]  121.1,11.2 90 bottom
LOGO18  SFE_LOGO_FLAME.1_INCH  [SFE_LOGO_FLAME_.1]  139.08,19.43 270 top
LOGO19  OSHW-LOGOMINI  [OSHW-LOGO-MINI]  161.65,18.7 90 bottom
LOGO20  SFE_LOGO_NAME_FLAME.1_INCH  [SFE_LOGO_NAME_FLAME_.1]  143.61,11.2 90 bottom
LOGO21  SFE_LOGO_FLAME.1_INCH  [SFE_LOGO_FLAME_.1]  161.59,19.43 270 top
LOGO22  OSHW-LOGOMINI  [OSHW-LOGO-MINI]  184.16,18.7 90 bottom
LOGO23  SFE_LOGO_NAME_FLAME.1_INCH  [SFE_LOGO_NAME_FLAME_.1]  166.11,11.2 90 bottom
LOGO24  SFE_LOGO_FLAME.1_INCH  [SFE_LOGO_FLAME_.1]  184.1,19.43 270 top
LOGO25  OSHW-LOGOMINI  [OSHW-LOGO-MINI]  9.11,51.15 270 bottom
LOGO26  SFE_LOGO_NAME_FLAME.1_INCH  [SFE_LOGO_NAME_FLAME_.1]  27.16,58.65 270 bottom
LOGO27  SFE_LOGO_FLAME.1_INCH  [SFE_LOGO_FLAME_.1]  9.17,50.42 90 top
LOGO28  OSHW-LOGOMINI  [OSHW-LOGO-MINI]  31.62,51.15 270 bottom
LOGO29  SFE_LOGO_NAME_FLAME.1_INCH  [SFE_LOGO_NAME_FLAME_.1]  49.67,58.65 270 bottom
LOGO30  SFE_LOGO_FLAME.1_INCH  [SFE_LOGO_FLAME_.1]  31.68,50.42 90 top
LOGO31  OSHW-LOGOMINI  [OSHW-LOGO-MINI]  54.13,51.15 270 bottom
LOGO32  SFE_LOGO_NAME_FLAME.1_INCH  [SFE_LOGO_NAME_FLAME_.1]  72.17,58.65 270 bottom
LOGO33  SFE_LOGO_FLAME.1_INCH  [SFE_LOGO_FLAME_.1]  54.19,50.42 90 top
LOGO34  OSHW-LOGOMINI  [OSHW-LOGO-MINI]  76.64,51.15 270 bottom
LOGO35  SFE_LOGO_NAME_FLAME.1_INCH  [SFE_LOGO_NAME_FLAME_.1]  94.68,58.65 270 bottom
LOGO36  SFE_LOGO_FLAME.1_INCH  [SFE_LOGO_FLAME_.1]  76.7,50.42 90 top
LOGO37  OSHW-LOGOMINI  [OSHW-LOGO-MINI]  99.14,51.15 270 bottom
LOGO38  SFE_LOGO_NAME_FLAME.1_INCH  [SFE_LOGO_NAME_FLAME_.1]  117.19,58.65 270 bottom
LOGO39  SFE_LOGO_FLAME.1_INCH  [SFE_LOGO_FLAME_.1]  99.2,50.42 90 top
LOGO40  OSHW-LOGOMINI  [OSHW-LOGO-MINI]  121.65,51.15 270 bottom
LOGO41  SFE_LOGO_NAME_FLAME.1_INCH  [SFE_LOGO_NAME_FLAME_.1]  139.7,58.65 270 bottom
LOGO42  SFE_LOGO_FLAME.1_INCH  [SFE_LOGO_FLAME_.1]  121.71,50.42 90 top
LOGO43  OSHW-LOGOMINI  [OSHW-LOGO-MINI]  144.16,51.15 270 bottom
LOGO44  SFE_LOGO_NAME_FLAME.1_INCH  [SFE_LOGO_NAME_FLAME_.1]  162.21,58.65 270 bottom
LOGO45  SFE_LOGO_FLAME.1_INCH  [SFE_LOGO_FLAME_.1]  144.22,50.42 90 top
LOGO46  OSHW-LOGOMINI  [OSHW-LOGO-MINI]  166.67,51.15 270 bottom
LOGO47  SFE_LOGO_NAME_FLAME.1_INCH  [SFE_LOGO_NAME_FLAME_.1]  184.71,58.65 270 bottom
LOGO48  SFE_LOGO_FLAME.1_INCH  [SFE_LOGO_FLAME_.1]  166.73,50.42 90 top
R1  1k  [0402-TIGHT]  12.86,21 0 top
R2  200OHM-0402T-1/16W-1%  [0402-TIGHT]  22.86,8 180 bottom
R3  1k  [0402-TIGHT]  35.36,21 0 top
R4  10k  [0402-TIGHT]  11.86,15 90 bottom
R5  10k  [0402-TIGHT]  24.86,14 180 bottom
R6  1k  [0402-TIGHT]  34.36,12 90 top
R7  1k  [0402-TIGHT]  35.36,15 90 bottom
R8  1k  [0402-TIGHT]  11.86,12 90 top
R9  1k  [0402-TIGHT]  12.86,15 90 bottom
R10  27  [0402-TIGHT]  22.86,12 0 bottom
R11  27  [0402-TIGHT]  22.86,11 0 bottom
R12  27  [0402-TIGHT]  45.36,11 0 bottom
R13  27  [0402-TIGHT]  45.36,12 0 bottom
R14  200OHM-0402T-1/16W-1%  [0402-TIGHT]  45.36,8 180 bottom
R15  10k  [0402-TIGHT]  34.36,15 90 bottom
R16  10k  [0402-TIGHT]  47.36,14 180 bottom
R17  1k  [0402-TIGHT]  49.36,14 0 bottom
R18  1k  [0402-TIGHT]  26.86,14 0 bottom
R19  1k  [0402-TIGHT]  57.87,21 0 top
R20  1k  [0402-TIGHT]  56.87,12 90 top
R21  1k  [0402-TIGHT]  57.87,15 90 bottom
R22  27  [0402-TIGHT]  67.87,11 0 bottom
R23  27  [0402-TIGHT]  67.87,12 0 bottom
R24  200OHM-0402T-1/16W-1%  [0402-TIGHT]  67.87,8 180 bottom
R25  10k  [0402-TIGHT]  56.87,15 90 bottom
R26  10k  [0402-TIGHT]  69.87,14 180 bottom
R27  1k  [0402-TIGHT]  71.87,14 0 bottom
R28  1k  [0402-TIGHT]  80.38,21 0 top
R29  1k  [0402-TIGHT]  79.38,12 90 top
R30  1k  [0402-TIGHT]  80.38,15 90 bottom
R31  27  [0402-TIGHT]  90.38,11 0 bottom
R32  27  [0402-TIGHT]  90.38,12 0 bottom
R33  200OHM-0402T-1/16W-1%  [0402-TIGHT]  90.38,8 180 bottom
R34  10k  [0402-TIGHT]  79.38,15 90 bottom
R35  10k  [0402-TIGHT]  92.38,14 180 bottom
R36  1k  [0402-TIGHT]  94.38,14 0 bottom
R37  1k  [0402-TIGHT]  102.89,21 0 top
R38  1k  [0402-TIGHT]  101.89,12 90 top
R39  1k  [0402-TIGHT]  102.89,15 90 bottom
R40  27  [0402-TIGHT]  112.89,11 0 bottom
R41  27  [0402-TIGHT]  112.89,12 0 bottom
R42  200OHM-0402T-1/16W-1%  [0402-TIGHT]  112.89,8 180 bottom
R43  10k  [0402-TIGHT]  101.89,15 90 bottom
R44  10k  [0402-TIGHT]  114.89,14 180 bottom
R45  1k  [0402-TIGHT]  116.89,14 0 bottom
R46  1k  [0402-TIGHT]  125.4,21 0 top
R47  1k  [0402-TIGHT]  124.4,12 90 top
R48  1k  [0402-TIGHT]  125.4,15 90 bottom
R49  27  [0402-TIGHT]  135.4,11 0 bottom
R50  27  [0402-TIGHT]  135.4,12 0 bottom
R51  200OHM-0402T-1/16W-1%  [0402-TIGHT]  135.4,8 180 bottom
R52  10k  [0402-TIGHT]  124.4,15 90 bottom
R53  10k  [0402-TIGHT]  137.4,14 180 bottom
R54  1k  [0402-TIGHT]  139.4,14 0 bottom
R55  1k  [0402-TIGHT]  147.91,21 0 top
R56  1k  [0402-TIGHT]  146.91,12 90 top
R57  1k  [0402-TIGHT]  147.91,15 90 bottom
R58  27  [0402-TIGHT]  157.91,11 0 bottom
R59  27  [0402-TIGHT]  157.91,12 0 bottom
R60  200OHM-0402T-1/16W-1%  [0402-TIGHT]  157.91,8 180 bottom
R61  10k  [0402-TIGHT]  146.91,15 90 bottom
R62  10k  [0402-TIGHT]  159.91,14 180 bottom
R63  1k  [0402-TIGHT]  161.91,14 0 bottom
R64  1k  [0402-TIGHT]  170.41,21 0 top
R65  1k  [0402-TIGHT]  169.41,12 90 top
R66  1k  [0402-TIGHT]  170.41,15 90 bottom
R67  27  [0402-TIGHT]  180.41,11 0 bottom
R68  27  [0402-TIGHT]  180.41,12 0 bottom
R69  200OHM-0402T-1/16W-1%  [0402-TIGHT]  180.41,8 180 bottom
R70  10k  [0402-TIGHT]  169.41,15 90 bottom
R71  10k  [0402-TIGHT]  182.41,14 180 bottom
R72  1k  [0402-TIGHT]  184.41,14 0 bottom
R73  1k  [0402-TIGHT]  22.86,48.85 180 top
R74  1k  [0402-TIGHT]  23.86,57.85 270 top
R75  1k  [0402-TIGHT]  22.86,54.85 270 bottom
R76  27  [0402-TIGHT]  12.86,58.85 180 bottom
R77  27  [0402-TIGHT]  12.86,57.85 180 bottom
R78  200OHM-0402T-1/16W-1%  [0402-TIGHT]  12.86,61.85 0 bottom
R79  10k  [0402-TIGHT]  23.86,54.85 270 bottom
R80  10k  [0402-TIGHT]  10.86,55.85 0 bottom
R81  1k  [0402-TIGHT]  8.86,55.85 180 bottom
R82  1k  [0402-TIGHT]  45.37,48.85 180 top
R83  1k  [0402-TIGHT]  46.37,57.85 270 top
R84  1k  [0402-TIGHT]  45.37,54.85 270 bottom
R85  27  [0402-TIGHT]  35.37,58.85 180 bottom
R86  27  [0402-TIGHT]  35.37,57.85 180 bottom
R87  200OHM-0402T-1/16W-1%  [0402-TIGHT]  35.37,61.85 0 bottom
R88  10k  [0402-TIGHT]  46.37,54.85 270 bottom
R89  10k  [0402-TIGHT]  33.37,55.85 0 bottom
R90  1k  [0402-TIGHT]  31.37,55.85 180 bottom
R91  1k  [0402-TIGHT]  67.87,48.85 180 top
R92  1k  [0402-TIGHT]  68.87,57.85 270 top
R93  1k  [0402-TIGHT]  67.87,54.85 270 bottom
R94  27  [0402-TIGHT]  57.87,58.85 180 bottom
R95  27  [0402-TIGHT]  57.87,57.85 180 bottom
R96  200OHM-0402T-1/16W-1%  [0402-TIGHT]  57.87,61.85 0 bottom
R97  10k  [0402-TIGHT]  68.87,54.85 270 bottom
R98  10k  [0402-TIGHT]  55.87,55.85 0 bottom
R99  1k  [0402-TIGHT]  53.87,55.85 180 bottom
R100  1k  [0402-TIGHT]  90.38,48.85 180 top
R101  1k  [0402-TIGHT]  91.38,57.85 270 top
R102  1k  [0402-TIGHT]  90.38,54.85 270 bottom
R103  27  [0402-TIGHT]  80.38,58.85 180 bottom
R104  27  [0402-TIGHT]  80.38,57.85 180 bottom
R105  200OHM-0402T-1/16W-1%  [0402-TIGHT]  80.38,61.85 0 bottom
R106  10k  [0402-TIGHT]  91.38,54.85 270 bottom
R107  10k  [0402-TIGHT]  78.38,55.85 0 bottom
R108  1k  [0402-TIGHT]  76.38,55.85 180 bottom
R109  1k  [0402-TIGHT]  112.89,48.85 180 top
R110  1k  [0402-TIGHT]  113.89,57.85 270 top
R111  1k  [0402-TIGHT]  112.89,54.85 270 bottom
R112  27  [0402-TIGHT]  102.89,58.85 180 bottom
R113  27  [0402-TIGHT]  102.89,57.85 180 bottom
R114  200OHM-0402T-1/16W-1%  [0402-TIGHT]  102.89,61.85 0 bottom
R115  10k  [0402-TIGHT]  113.89,54.85 270 bottom
R116  10k  [0402-TIGHT]  100.89,55.85 0 bottom
R117  1k  [0402-TIGHT]  98.89,55.85 180 bottom
R118  1k  [0402-TIGHT]  135.4,48.85 180 top
R119  1k  [0402-TIGHT]  136.4,57.85 270 top
R120  1k  [0402-TIGHT]  135.4,54.85 270 bottom
R121  27  [0402-TIGHT]  125.4,58.85 180 bottom
R122  27  [0402-TIGHT]  125.4,57.85 180 bottom
R123  200OHM-0402T-1/16W-1%  [0402-TIGHT]  125.4,61.85 0 bottom
R124  10k  [0402-TIGHT]  136.4,54.85 270 bottom
R125  10k  [0402-TIGHT]  123.4,55.85 0 bottom
R126  1k  [0402-TIGHT]  121.4,55.85 180 bottom
R127  1k  [0402-TIGHT]  157.91,48.85 180 top
R128  1k  [0402-TIGHT]  158.91,57.85 270 top
R129  1k  [0402-TIGHT]  157.91,54.85 270 bottom
R130  27  [0402-TIGHT]  147.91,58.85 180 bottom
R131  27  [0402-TIGHT]  147.91,57.85 180 bottom
R132  200OHM-0402T-1/16W-1%  [0402-TIGHT]  147.91,61.85 0 bottom
R133  10k  [0402-TIGHT]  158.91,54.85 270 bottom
R134  10k  [0402-TIGHT]  145.91,55.85 0 bottom
R135  1k  [0402-TIGHT]  143.91,55.85 180 bottom
R136  1k  [0402-TIGHT]  180.41,48.85 180 top
R137  1k  [0402-TIGHT]  181.41,57.85 270 top
R138  1k  [0402-TIGHT]  180.41,54.85 270 bottom
R139  27  [0402-TIGHT]  170.41,58.85 180 bottom
R140  27  [0402-TIGHT]  170.41,57.85 180 bottom
R141  200OHM-0402T-1/16W-1%  [0402-TIGHT]  170.41,61.85 0 bottom
R142  10k  [0402-TIGHT]  181.41,54.85 270 bottom
R143  10k  [0402-TIGHT]  168.41,55.85 0 bottom
R144  1k  [0402-TIGHT]  166.41,55.85 180 bottom
U1  W25QXX128MBIT  [WSON-8-6X5-SKINNY_CENTERPAD]  17.86,16 180 bottom
U2  FSUSB30MUX_MSOP10  [MSOP10]  25.86,10 270 bottom
U3  RP2040  [QFN-56]  17.86,12 270 top
U4  RP2040  [QFN-56]  40.36,12 270 top
U5  W25QXX128MBIT  [WSON-8-6X5-SKINNY_CENTERPAD]  40.36,16 180 bottom
U6  FSUSB30MUX_MSOP10  [MSOP10]  48.36,10 270 bottom
U7  RP2040  [QFN-56]  62.87,12 270 top
U8  W25QXX128MBIT  [WSON-8-6X5-SKINNY_CENTERPAD]  62.87,16 180 bottom
U9  FSUSB30MUX_MSOP10  [MSOP10]  70.87,10 270 bottom
U10  RP2040  [QFN-56]  85.38,12 270 top
U11  W25QXX128MBIT  [WSON-8-6X5-SKINNY_CENTERPAD]  85.38,16 180 bottom
U12  FSUSB30MUX_MSOP10  [MSOP10]  93.38,10 270 bottom
U13  RP2040  [QFN-56]  107.89,12 270 top
U14  W25QXX128MBIT  [WSON-8-6X5-SKINNY_CENTERPAD]  107.89,16 180 bottom
U15  FSUSB30MUX_MSOP10  [MSOP10]  115.89,10 270 bottom
U16  RP2040  [QFN-56]  130.4,12 270 top
U17  W25QXX128MBIT  [WSON-8-6X5-SKINNY_CENTERPAD]  130.4,16 180 bottom
U18  FSUSB30MUX_MSOP10  [MSOP10]  138.4,10 270 bottom
U19  RP2040  [QFN-56]  152.91,12 270 top
U20  W25QXX128MBIT  [WSON-8-6X5-SKINNY_CENTERPAD]  152.91,16 180 bottom
U21  FSUSB30MUX_MSOP10  [MSOP10]  160.91,10 270 bottom
U22  RP2040  [QFN-56]  175.41,12 270 top
U23  W25QXX128MBIT  [WSON-8-6X5-SKINNY_CENTERPAD]  175.41,16 180 bottom
U24  FSUSB30MUX_MSOP10  [MSOP10]  183.41,10 270 bottom
U25  RP2040  [QFN-56]  17.86,57.85 90 top
U26  W25QXX128MBIT  [WSON-8-6X5-SKINNY_CENTERPAD]  17.86,53.85 0 bottom
U27  FSUSB30MUX_MSOP10  [MSOP10]  9.86,59.85 90 bottom
U28  RP2040  [QFN-56]  40.37,57.85 90 top
U29  W25QXX128MBIT  [WSON-8-6X5-SKINNY_CENTERPAD]  40.37,53.85 0 bottom
U30  FSUSB30MUX_MSOP10  [MSOP10]  32.37,59.85 90 bottom
U31  RP2040  [QFN-56]  62.87,57.85 90 top
U32  W25QXX128MBIT  [WSON-8-6X5-SKINNY_CENTERPAD]  62.87,53.85 0 bottom
U33  FSUSB30MUX_MSOP10  [MSOP10]  54.87,59.85 90 bottom
U34  RP2040  [QFN-56]  85.38,57.85 90 top
U35  W25QXX128MBIT  [WSON-8-6X5-SKINNY_CENTERPAD]  85.38,53.85 0 bottom
U36  FSUSB30MUX_MSOP10  [MSOP10]  77.38,59.85 90 bottom
U37  RP2040  [QFN-56]  107.89,57.85 90 top
U38  W25QXX128MBIT  [WSON-8-6X5-SKINNY_CENTERPAD]  107.89,53.85 0 bottom
U39  FSUSB30MUX_MSOP10  [MSOP10]  99.89,59.85 90 bottom
U40  RP2040  [QFN-56]  130.4,57.85 90 top
U41  W25QXX128MBIT  [WSON-8-6X5-SKINNY_CENTERPAD]  130.4,53.85 0 bottom
U42  FSUSB30MUX_MSOP10  [MSOP10]  122.4,59.85 90 bottom
U43  RP2040  [QFN-56]  152.91,57.85 90 top
U44  W25QXX128MBIT  [WSON-8-6X5-SKINNY_CENTERPAD]  152.91,53.85 0 bottom
U45  FSUSB30MUX_MSOP10  [MSOP10]  144.91,59.85 90 bottom
U46  RP2040  [QFN-56]  175.41,57.85 90 top
U47  W25QXX128MBIT  [WSON-8-6X5-SKINNY_CENTERPAD]  175.41,53.85 0 bottom
U48  FSUSB30MUX_MSOP10  [MSOP10]  167.41,59.85 90 bottom
U$1  [MICROMOD_MI_LOGO_.35]  8.67,6.97 270 top
U$2  [MICROMOD_MI_LOGO_.35]  31.17,6.97 270 top
U$3  [MICROMOD_LOGO_.3]  12.57,6.73 90 bottom
U$4  [RP20400]  10.79,6.86 90 bottom
U$5  [MICROMOD_MI_LOGO_.35]  49.11,15.96 90 bottom
U$6  [STAT0]  29.75,19.68 0 top
U$7  [MICROMOD_MI_LOGO_.35]  26.6,15.96 90 bottom
U$8  [RP20400]  46.89,11.94 270 top
U$9  [RP20400]  24.38,11.94 270 top
U$10  [MICROMOD_LOGO_.3]  48.54,12.06 270 top
U$11  [STAT0]  7.24,19.68 0 top
U$12  [MICROMOD_LOGO_.3]  26.04,12.06 270 top
U$13  [MICROMOD_LOGO_.3]  35.08,6.73 90 bottom
U$14  [RP20400]  33.3,6.86 90 bottom
U$15  [MICROMOD_MI_LOGO_.35]  53.68,6.97 270 top
U$16  [MICROMOD_MI_LOGO_.35]  71.62,15.96 90 bottom
U$17  [STAT0]  52.26,19.68 0 top
U$18  [RP20400]  69.4,11.94 270 top
U$19  [MICROMOD_LOGO_.3]  71.05,12.06 270 top
U$20  [MICROMOD_LOGO_.3]  57.59,6.73 90 bottom
U$21  [RP20400]  55.81,6.86 90 bottom
U$22  [MICROMOD_MI_LOGO_.35]  76.19,6.97 270 top
U$23  [MICROMOD_MI_LOGO_.35]  94.13,15.96 90 bottom
U$24  [STAT0]  74.76,19.68 0 top
U$25  [RP20400]  91.91,11.94 270 top
U$26  [MICROMOD_LOGO_.3]  93.56,12.06 270 top
U$27  [MICROMOD_LOGO_.3]  80.1,6.73 90 bottom
U$28  [RP20400]  78.32,6.86 90 bottom
U$29  [MICROMOD_MI_LOGO_.35]  98.7,6.97 270 top
U$30  [MICROMOD_MI_LOGO_.35]  116.64,15.96 90 bottom
U$31  [STAT0]  97.27,19.68 0 top
U$32  [RP20400]  114.42,11.94 270 top
U$33  [MICROMOD_LOGO_.3]  116.07,12.06 270 top
U$34  [MICROMOD_LOGO_.3]  102.61,6.73 90 bottom
U$35  [RP20400]  100.83,6.86 90 bottom
U$36  [MICROMOD_MI_LOGO_.35]  121.21,6.97 270 top
U$37  [MICROMOD_MI_LOGO_.35]  139.14,15.96 90 bottom
U$38  [STAT0]  119.78,19.68 0 top
U$39  [RP20400]  136.92,11.94 270 top
U$40  [MICROMOD_LOGO_.3]  138.57,12.06 270 top
U$41  [MICROMOD_LOGO_.3]  125.11,6.73 90 bottom
U$42  [RP20400]  123.33,6.86 90 bottom
U$43  [MICROMOD_MI_LOGO_.35]  143.72,6.97 270 top
U$44  [MICROMOD_MI_LOGO_.35]  161.65,15.96 90 bottom
U$45  [STAT0]  142.29,19.68 0 top
U$46  [RP20400]  159.43,11.94 270 top
U$47  [MICROMOD_LOGO_.3]  161.08,12.06 270 top
U$48  [MICROMOD_LOGO_.3]  147.62,6.73 90 bottom
U$49  [RP20400]  145.84,6.86 90 bottom
U$50  [MICROMOD_MI_LOGO_.35]  166.22,6.97 270 top
U$51  [MICROMOD_MI_LOGO_.35]  184.16,15.96 90 bottom
U$52  [STAT0]  164.8,19.68 0 top
U$53  [RP20400]  181.94,11.94 270 top
U$54  [MICROMOD_LOGO_.3]  183.59,12.06 270 top
U$55  [MICROMOD_LOGO_.3]  170.13,6.73 90 bottom
U$56  [RP20400]  168.35,6.86 90 bottom
U$57  [MICROMOD_MI_LOGO_.35]  27.05,62.88 90 top
U$58  [MICROMOD_MI_LOGO_.35]  9.11,53.9 270 bottom
U$59  [STAT0]  28.48,50.16 180 top
U$60  [RP20400]  11.33,57.91 90 top
U$61  [MICROMOD_LOGO_.3]  9.68,57.78 90 top
U$62  [MICROMOD_LOGO_.3]  23.14,63.12 270 bottom
U$63  [RP20400]  24.92,62.99 270 bottom
U$64  [MICROMOD_MI_LOGO_.35]  49.56,62.88 90 top
U$65  [MICROMOD_MI_LOGO_.35]  31.62,53.9 270 bottom
U$66  [STAT0]  50.99,50.16 180 top
U$67  [RP20400]  33.84,57.91 90 top
U$68  [MICROMOD_LOGO_.3]  32.19,57.78 90 top
U$69  [MICROMOD_LOGO_.3]  45.65,63.12 270 bottom
U$70  [RP20400]  47.43,62.99 270 bottom
U$71  [MICROMOD_MI_LOGO_.35]  72.06,62.88 90 top
U$72  [MICROMOD_MI_LOGO_.35]  54.13,53.9 270 bottom
U$73  [STAT0]  73.49,50.16 180 top
U$74  [RP20400]  56.35,57.91 90 top
U$75  [MICROMOD_LOGO_.3]  54.7,57.78 90 top
U$76  [MICROMOD_LOGO_.3]  68.16,63.12 270 bottom
U$77  [RP20400]  69.94,62.99 270 bottom
U$78  [MICROMOD_MI_LOGO_.35]  94.57,62.88 90 top
U$79  [MICROMOD_MI_LOGO_.35]  76.64,53.9 270 bottom
U$80  [STAT0]  96,50.16 180 top
U$81  [RP20400]  78.86,57.91 90 top
U$82  [MICROMOD_LOGO_.3]  77.21,57.78 90 top
U$83  [MICROMOD_LOGO_.3]  90.67,63.12 270 bottom
U$84  [RP20400]  92.45,62.99 270 bottom
U$85  [MICROMOD_MI_LOGO_.35]  117.08,62.88 90 top
U$86  [MICROMOD_MI_LOGO_.35]  99.14,53.9 270 bottom
U$87  [STAT0]  118.51,50.16 180 top
U$88  [RP20400]  101.36,57.91 90 top
U$89  [MICROMOD_LOGO_.3]  99.71,57.78 90 top
U$90  [MICROMOD_LOGO_.3]  113.17,63.12 270 bottom
U$91  [RP20400]  114.95,62.99 270 bottom
U$92  [MICROMOD_MI_LOGO_.35]  139.59,62.88 90 top
U$93  [MICROMOD_MI_LOGO_.35]  121.65,53.9 270 bottom
U$94  [STAT0]  141.02,50.16 180 top
U$95  [RP20400]  123.87,57.91 90 top
U$96  [MICROMOD_LOGO_.3]  122.22,57.78 90 top
U$97  [MICROMOD_LOGO_.3]  135.68,63.12 270 bottom
U$98  [RP20400]  137.46,62.99 270 bottom
U$99  [MICROMOD_MI_LOGO_.35]  162.1,62.88 90 top
U$100  [MICROMOD_MI_LOGO_.35]  144.16,53.9 270 bottom
U$101  [STAT0]  163.53,50.16 180 top
U$102  [RP20400]  146.38,57.91 90 top
U$103  [MICROMOD_LOGO_.3]  144.73,57.78 90 top
U$104  [MICROMOD_LOGO_.3]  158.19,63.12 270 bottom
U$105  [RP20400]  159.97,62.99 270 bottom
U$106  [MICROMOD_MI_LOGO_.35]  184.6,62.88 90 top
U$107  [MICROMOD_MI_LOGO_.35]  166.67,53.9 270 bottom
U$108  [STAT0]  186.03,50.16 180 top
U$109  [RP20400]  168.89,57.91 90 top
U$110  [MICROMOD_LOGO_.3]  167.24,57.78 90 top
U$111  [MICROMOD_LOGO_.3]  180.7,63.12 270 bottom
U$112  [RP20400]  182.48,62.99 270 bottom
Y1  12MHz  [CRYSTAL-SMD-2X2.5MM]  9.86,12 270 top
Y2  12MHz  [CRYSTAL-SMD-2X2.5MM]  32.36,12 270 top
Y3  12MHz  [CRYSTAL-SMD-2X2.5MM]  54.87,12 270 top
Y4  12MHz  [CRYSTAL-SMD-2X2.5MM]  77.38,12 270 top
Y5  12MHz  [CRYSTAL-SMD-2X2.5MM]  99.89,12 270 top
Y6  12MHz  [CRYSTAL-SMD-2X2.5MM]  122.4,12 270 top
Y7  12MHz  [CRYSTAL-SMD-2X2.5MM]  144.91,12 270 top
Y8  12MHz  [CRYSTAL-SMD-2X2.5MM]  167.41,12 270 top
Y9  12MHz  [CRYSTAL-SMD-2X2.5MM]  25.86,57.85 90 top
Y10  12MHz  [CRYSTAL-SMD-2X2.5MM]  48.37,57.85 90 top
Y11  12MHz  [CRYSTAL-SMD-2X2.5MM]  70.87,57.85 90 top
Y12  12MHz  [CRYSTAL-SMD-2X2.5MM]  93.38,57.85 90 top
Y13  12MHz  [CRYSTAL-SMD-2X2.5MM]  115.89,57.85 90 top
Y14  12MHz  [CRYSTAL-SMD-2X2.5MM]  138.4,57.85 90 top
Y15  12MHz  [CRYSTAL-SMD-2X2.5MM]  160.91,57.85 90 top
Y16  12MHz  [CRYSTAL-SMD-2X2.5MM]  183.41,57.85 90 top

## Library data of the parts
C1 C3 C4 C15 C27 C28 C30 C31 C44-C47 C60-C63 C76-C79 C92-C95 C108-C111 C124-C127 C140-C143 C156-C159 C172-C175 C188-C191 C204-C207 C220-C223 C236-C239 C252-C255 = SparkFun-Capacitors; PROD_ID: CAP-14232
C2 C5-C10 C12 C14 C18-C26 C29 C32 C35-C43 C48 C51-C59 C64 C67-C75 C80 C83-C91 C96 C99-C107 C112 C115-C123 C128 C131-C139 C144 C147-C155 C160 C163-C171 C176 C179-C187 C192 C195-C203 C208 C211-C219 C224 C227-C235 C240 C243-C251 C256 = SparkFun-Capacitors; PROD_ID: CAP-14993
C11 C13 C16 C17 C33 C34 C49 C50 C65 C66 C81 C82 C97 C98 C113 C114 C129 C130 C145 C146 C161 C162 C177 C178 C193 C194 C209 C210 C225 C226 C241 C242 = SparkFun-Capacitors; PROD_ID: CAP-13063
D1-D16 = SparkFun-LED; PROD_ID: DIO-08575
E$1-E$4 FD1-FD64 LOGO1-LOGO48 = SparkFun-Aesthetics
E$5 E$6 = SparkFun-Retired
J1-J16 U$1-U$3 U$5 U$7 U$10 U$12 U$13 U$15 U$16 U$19 U$20 U$22 U$23 U$26 U$27 U$29 U$30 U$33 U$34 U$36 U$37 U$40 U$41 U$43 U$44 U$47 U$48 U$50 U$51 U$54 U$55 U$57 U$58 U$61 U$62 U$64 U$65 U$68 U$69 U$71 U$72 U$75 U$76 U$78 U$79 U$82 U$83 U$85 U$86 U$89 U$90 U$92 U$93 U$96 U$97 U$99 U$100 U$103 U$104 U$106 U$107 U$110 U$111 = SparkFun-MicroMod
R1 R3 R6-R9 R17-R21 R27-R30 R36-R39 R45-R48 R54-R57 R63-R66 R72-R75 R81-R84 R90-R93 R99-R102 R108-R111 R117-R120 R126-R129 R135-R138 R144 = SparkFun-Resistors; PROD_ID: RES-14342
R2 R14 R24 R33 R42 R51 R60 R69 R78 R87 R96 R105 R114 R123 R132 R141 = SparkFun-Resistors; PROD_ID: RES-15550
R4 R5 R15 R16 R25 R26 R34 R35 R43 R44 R52 R53 R61 R62 R70 R71 R79 R80 R88 R89 R97 R98 R106 R107 R115 R116 R124 R125 R133 R134 R142 R143 = SparkFun-Resistors; PROD_ID: RES-14241
R10-R13 R22 R23 R31 R32 R40 R41 R49 R50 R58 R59 R67 R68 R76 R77 R85 R86 R94 R95 R103 R104 R112 R113 R121 R122 R130 R131 R139 R140 = SparkFun-Resistors; PROD_ID: RES-15238
U1 U5 U8 U11 U14 U17 U20 U23 U26 U29 U32 U35 U38 U41 U44 U47 = SparkFun-IC-Memory; PROD_ID: IC-15107
U2 U6 U9 U12 U15 U18 U21 U24 U27 U30 U33 U36 U39 U42 U45 U48 = SparkFun-IC-Special-Function; PROD_ID: IC-15569
U3 U4 U7 U10 U13 U16 U19 U22 U25 U28 U31 U34 U37 U40 U43 U46 = RP2040; PROD_ID: IC-15502
U$4 U$6 U$8 U$9 U$11 U$14 U$17 U$18 U$21 U$24 U$25 U$28 U$31 U$32 U$35 U$38 U$39 U$42 U$45 U$46 U$49 U$52 U$53 U$56 U$59 U$60 U$63 U$66 U$67 U$70 U$73 U$74 U$77 U$80 U$81 U$84 U$87 U$88 U$91 U$94 U$95 U$98 U$101 U$102 U$105 U$108 U$109 U$112 = output
Y1-Y16 = SparkFun-Clocks; PROD_ID: XTAL-15540